# Allegro board RS485PROTECT_V10A.brd
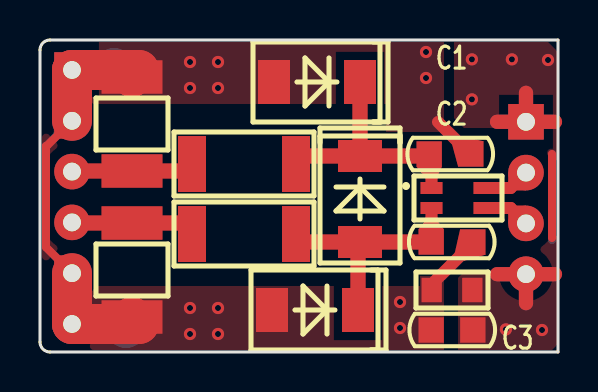
[diagram p0: board, top side]
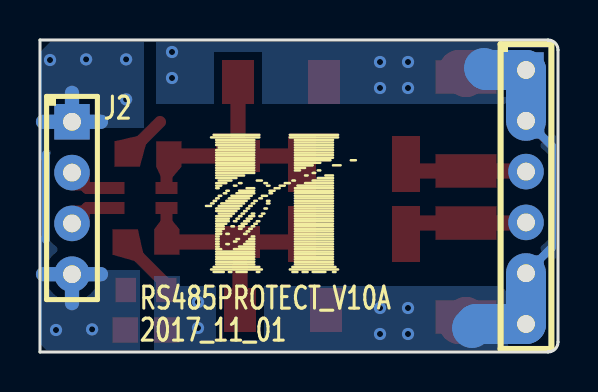
[diagram p1: board, bottom side, seen from below]

Outline 25.9 x 15.6 mm; copper layers: TOP, BOTTOM. Coordinates in mm from the lower left corner of the outline.
Outline path: 0,15.1 0,0.5 arc(0.15,0.15) 0.5,0 25.9,0 25.9,15.6 0.5,15.6 arc(0.15,15.45) 0,15.1

## Design rules (mm)
net group DP6: nets IN_RS485_A IN_RS485_B

## Placement (name value [footprint] x y rotation side)
C1  100pF_50V  [CC0805]  20.5 9.9 0 top
C2  100pF_50V  [CC0805]  20.6 5.5 180 top
C3  4.7nF_50V  [CC0805]  20.6 1.1 0 top
D1  BS0300N-C  [DO-214AA]  13.8 13.5 180 top
D2  BS0300N-C  [DO-214AA]  16 7.6 270 top
D3  BS0300N-C  [DO-214AA]  13.7 2.1 180 top
GDT1  -  [BA301N]  4.6 11.4 270 top
GDT2  -  [BA301N]  4.6 4.1 270 top
J1  -  [HEADER6X1_2R54]  1.6 14.1 270 bottom
J2  -  [HEADER4X1_2R54]  24.3 7.7 270 bottom
L1  WCM3216-222T  [WCM3216]  20.9 7.7 0 top
NOREF  -  []  0 0 0 top
NOREF#2  -  []  0 0 90 top
R1  10R  [R2010]  10.2 9.4 180 top
R2  10R  [R2010]  10.2 5.9 180 top
R3  10M  [R0805]  20.6 3.1 0 top

## Library data of the parts
C1-C3 = CAP NP_2
D1-D3 = P6SMB_1
GDT1 GDT2 = BA301N
J1 = HEADER 6
J2 = HEADER 4
L1 = 744822222_0
R1-R3 = R_Generic

## Footprints (pads in the part's own frame, mm; a bottom-side part is the same pattern mirrored in y, then rotated)
BA301N
  rect 1.676x3.048 smd: 1(-2.349,0) 2(2.349,0)
CC0805
  rect 1.27x1.27 smd: 1(-1.041,0) 2(1.041,0)
DO-214AA
  rect 1.6x2.2 smd: 1(2.1,0) 2(-2.2,0)
HEADER4X1_2R54
  rect 1.778x1.778 hole 0.889: 1(-3.81,0)
  round 1.778 hole 0.889: 2(-1.27,0) 3(1.27,0) 4(3.81,0)
HEADER6X1_2R54
  rect 1.778x1.778 hole 0.889: 1(0,0)
  round 1.778 hole 0.889: 2(2.54,0) 3(5.08,0) 4(7.62,0) 5(10.16,0) 6(12.7,0)
R0805
  rect 1.016x1.219 smd: 1(-1.016,0) 2(1.016,0)
R2010
  rect 1.4x2.8 smd: 1(-2.6,0) 2(2.6,0)
WCM3216
  rect 1.1x0.6 smd: 1(-1.325,0.5) 2(-1.325,-0.5) 3(1.325,-0.5) 4(1.325,0.5)

## Nets
GND: C3.2 J2.1 J2.4 R3.2
GND_EARTH: C1.2 C2.1 C3.1 D1.1 D3.1 GDT1.1 GDT2.2 J1.1 J1.2 J1.5 J1.6 R3.1
IN_RS485_A: GDT1.2 J1.3 R1.2
IN_RS485_B: GDT2.1 J1.4 R2.2
OUT_RS485_A: J2.2 L1.4
OUT_RS485_B: J2.3 L1.3
N16969291: C2.2 D2.1 D3.2 L1.2 R2.1
N16969293: C1.1 D1.2 D2.2 L1.1 R1.1

## Via types
v1: diameter 0.61, hole 0.305, TOP to BOTTOM, 18 vias

## Routing (per net, layer and track width the routed paths; a pad name or vN(x,y) marks a point on that pad's centre or on a via; arc(x,y) is an arc through that point)
GND: length 25.9
  TOP w0.4: 25.6,9.9 25.6,5.7
  TOP w0.711: J2.1 24.3,12.96 ; J2.1 22.85,11.51 ; J2.1 25.75,11.51 ; 22.85,3.89 J2.4 ; J2.4 25.75,3.89 ; J2.4 24.3,2.44
  BOTTOM w0.4: 25.6,5.6 25.6,9.9
  BOTTOM w0.711: J2.1 24.3,12.96 ; J2.1 25.75,11.51 ; J2.1 22.85,11.51 ; J2.4 25.75,3.89 ; J2.4 24.3,2.44 ; J2.4 22.85,3.89
  vias: v1(21.6,14.63) v1(21.6,12.63) v1(23.3,1.13) v1(23.6,14.63) v1(25.1,1.1) v1(25.4,14.6)
GND_EARTH: length 45.8
  TOP w0.4: J1.5 0.3,5.24 0.3,10.3 0.34,10.3 J1.2
  TOP w0.6: R3.1 19.58,3.38 21.64,5.44 C2.1 ; 19.9,11.5 21.5,9.9 C1.2
  TOP w2: J1.2 J1.1 4.95,14.1 GDT1.1 ; J1.5 J1.6 4.95,1.4 GDT2.2
  BOTTOM w0.4: J1.5 0.3,5.24 0.3,10.3 1.56,11.56 J1.2
  BOTTOM w2: J1.5 J1.6 4.1,1.4 4.3,1.2 ; 3.7,14.2 3.6,14.1 J1.1 J1.2
  vias: v1(7.5,14.5) v1(7.5,13.2) v1(7.5,2.2) v1(7.5,0.9) v1(8.9,14.5) v1(8.9,13.2) v1(8.9,2.2) v1(8.9,0.9) v1(18,2.5) v1(18,1.2) v1(19.3,15) v1(19.3,13.7)
IN_RS485_A: length 6.3
  TOP w0.762: J1.3 1.63,9.05 GDT1.2 7.45,9.05 7.6,9.2 R1.2
IN_RS485_B: length 6.4
  TOP w0.762: R2.2 7.6,6.1 7.25,6.45 GDT2.1 1.63,6.45 J1.4
OUT_RS485_A: length 2.4
  TOP w0.6: J2.2 23.53,8.2 L1.4
OUT_RS485_B: length 2.4
  TOP w0.6: L1.3 23.53,7.2 J2.3
N16969291: length 12.1
  TOP w0.6: L1.2 19.57,5.52 C2.2
  TOP w0.762: D2.1 15.9,5.4 D3.2 ; D2.1 C2.2 ; D2.1 13.2,5.5 R2.1
N16969293: length 12.3
  TOP w0.6: L1.1 19.57,9.78 C1.1
  TOP w0.762: D2.2 13.2,9.8 R1.1 ; D2.2 19.36,9.8 C1.1 ; D2.2 D1.2

## Copper pours and planes (outline as drawn; the poured copper is in the pictures)
GND on TOP: 20.9,0.1 20.9,4.1 22.9,4.1 22.9,11.2 20.7,11.2 20.7,15.5 25.4,15.5 25.9,15 25.9,0.4 25.6,0.1 ; 2 cut-outs
GND on BOTTOM: 20.9,0.1 20.9,4.1 23,4.1 23,11.2 20.7,11.2 20.7,15.5 25.4,15.5 25.9,15 25.9,0.4 25.6,0.1 ; 1 cut-out
GND_EARTH on TOP (solid shape): 21.69,5.56 22.28,4.87 21.02,4.51 20.8,4.59 20.71,4.81 21.01,6.13
GND_EARTH on TOP (solid shape): 22.18,10.54 21.6,9.85 20.91,9.27 20.57,10.53 20.65,10.74 20.86,10.84
GND_EARTH on TOP: 0.5,0.1 0.1,0.5 0.1,15.1 0.5,15.5 20.2,15.5 20.2,11 17.3,11 17.3,12.4 2,12.4 2,3.3 19,3.3 19,3.8 20.2,3.8 20.2,0.1 ; 2 cut-outs
GND_EARTH on BOTTOM: 0.5,0.1 0.1,0.5 0.1,15.1 0.5,15.5 20.1,15.5 20.1,12.4 17.2,12.4 17.2,15 14.8,15 14.8,12.4 2,12.4 2,3.3 14.7,3.3 14.7,0.6 17.1,0.6 17.1,3.3 18.9,3.3 18.9,3.8 20.2,3.8 20.2,0.1 ; 2 cut-outs
N16969291 on TOP (solid shape): 19.43,6.75 19.58,6.79 19.72,6.75 20.19,6.13 19.56,5.42 18.92,6.13
N16969293 on TOP (solid shape): 20.09,9.27 19.77,8.59 19.6,8.51 19.42,8.56 18.82,9.27 19.45,9.97

Small or netless copper shapes (teardrops, artwork), in the pictures only: 4 on TOP, 2 on BOTTOM

## Text on the board
Ref Des/Silkscreen Bottom: RS485PROTECT_V10A | 2017_11_01
DIMENSION: FIGURE | SIZE | 0.3048 | 0.889 | DRILL CHART: TOP to BOTTOM | ALL UNITS ARE IN MILLIMETERS | PLATED | QTY | 18 | 10
